# Altium PCB 1.PcbDoc
Units mm, origin at the board's own origin, x right, y up, seen from the top; angles counter-clockwise.
Board outline 80.01 x 70 mm, 2 copper layers (Top Layer, Bottom Layer); 48 components, 24 nets, 118 pads, 16 vias.
Unrouted connection lines stored in the file: 9.
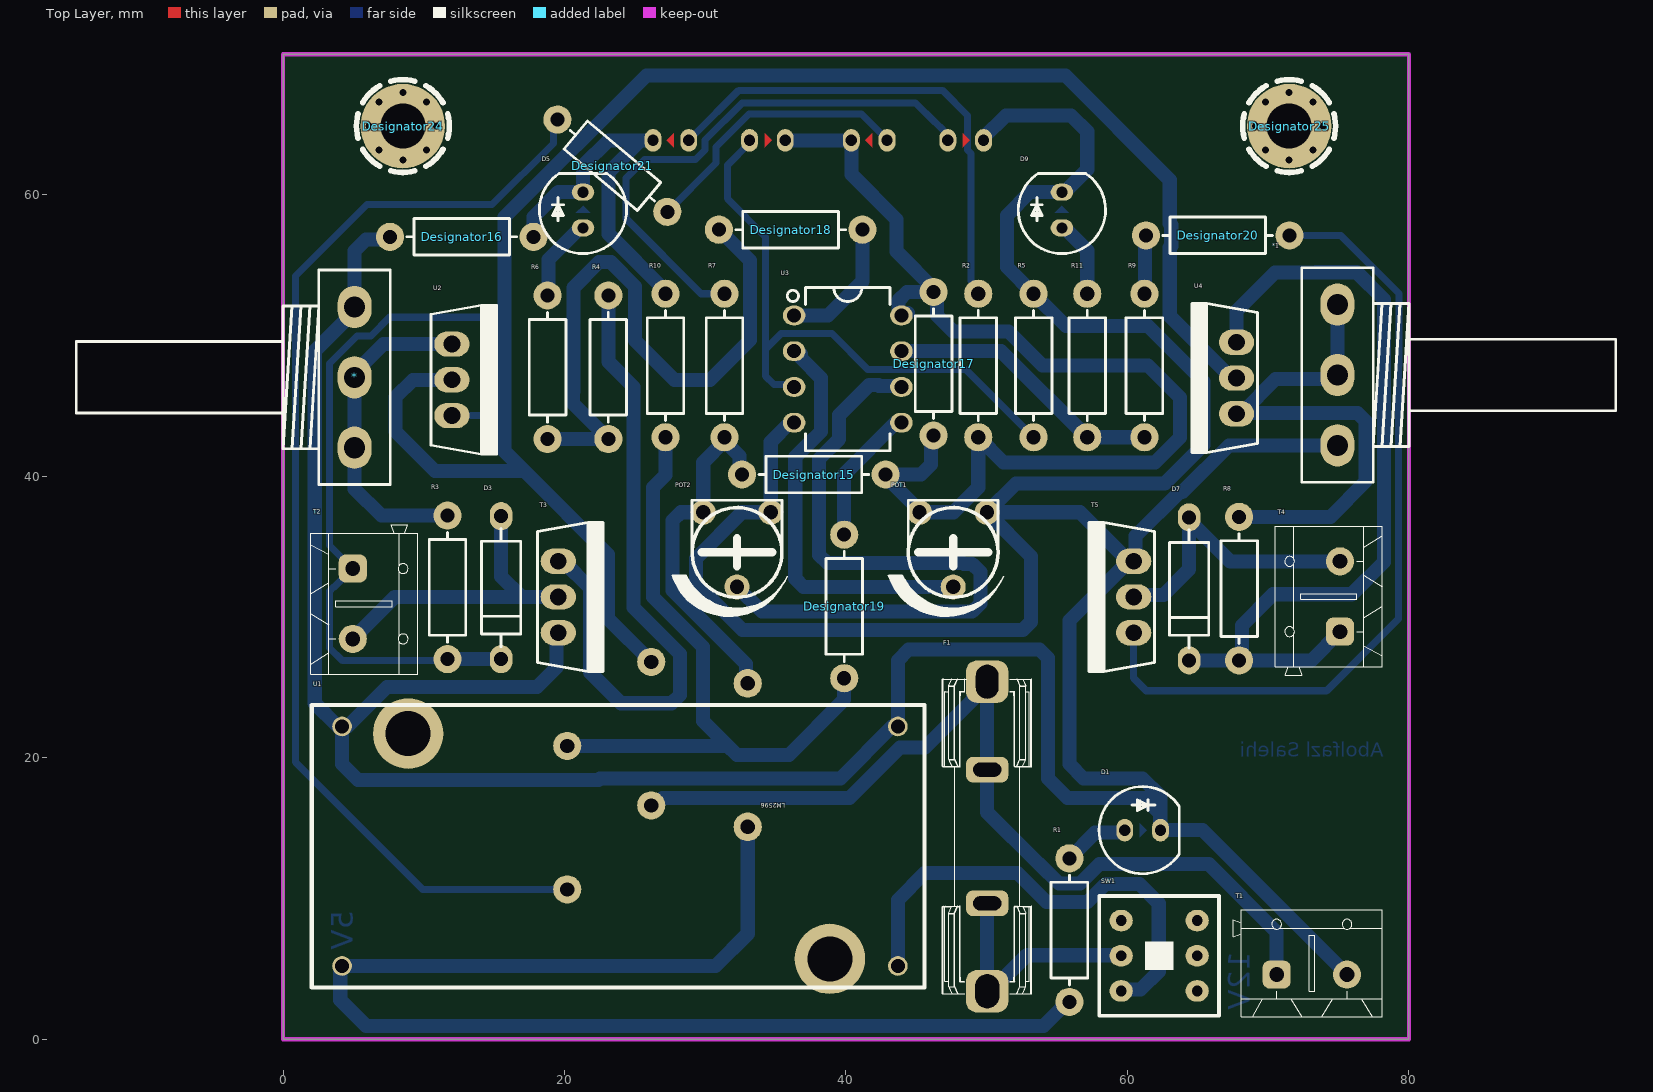
[diagram p0: Top Layer view]
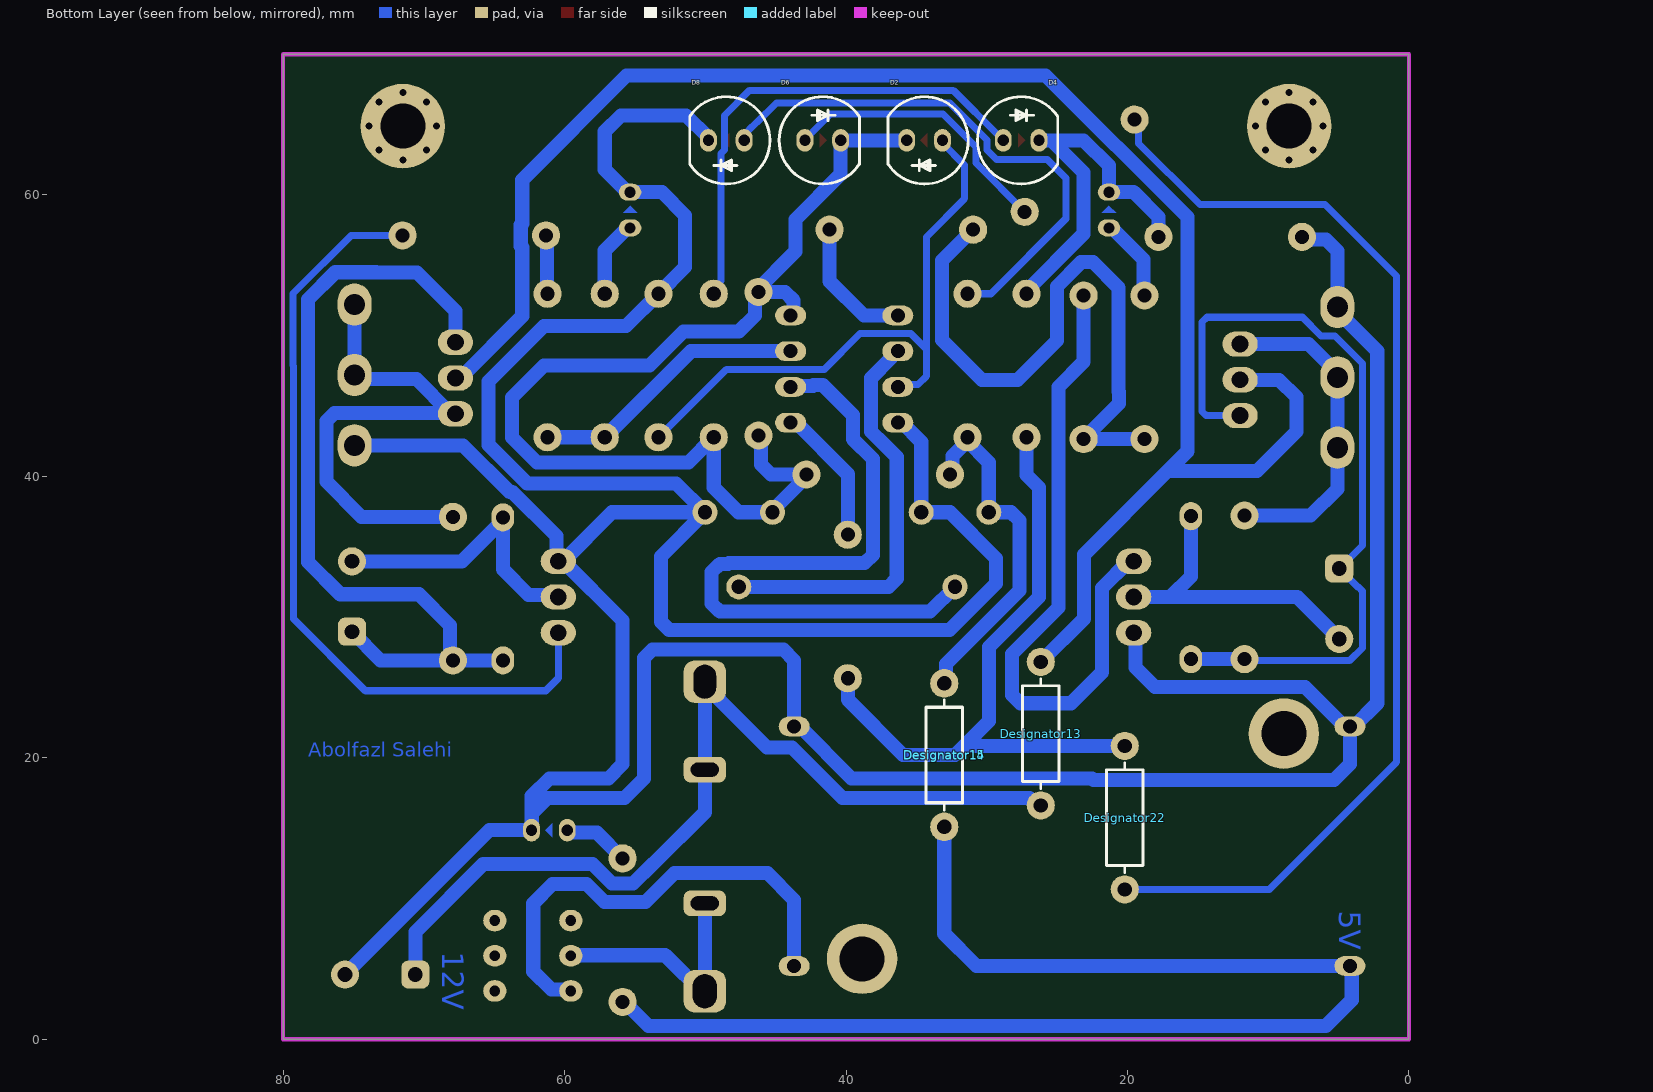
[diagram p1: Bottom Layer view, seen from below]
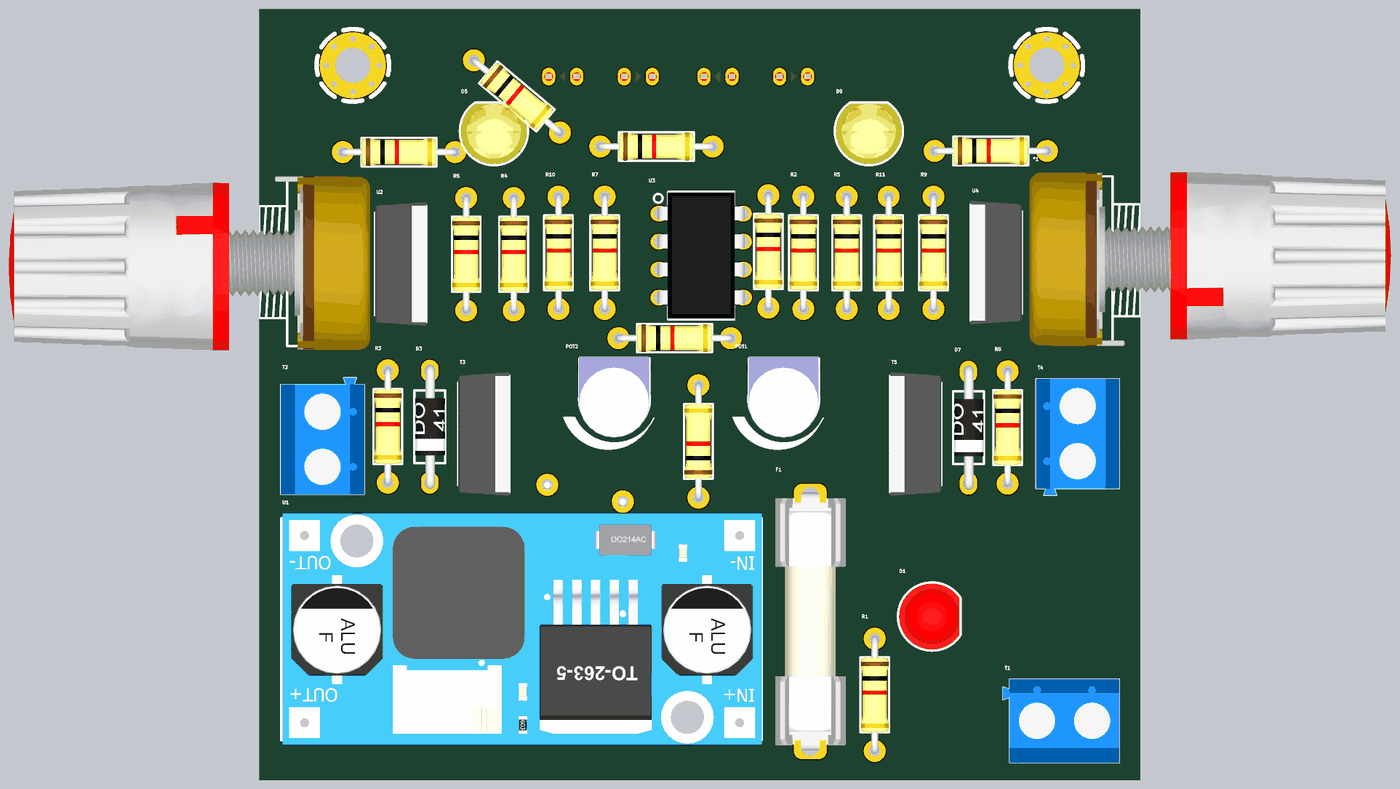
[diagram p2: 3D render of the assembled board from above, using the file's embedded part models]
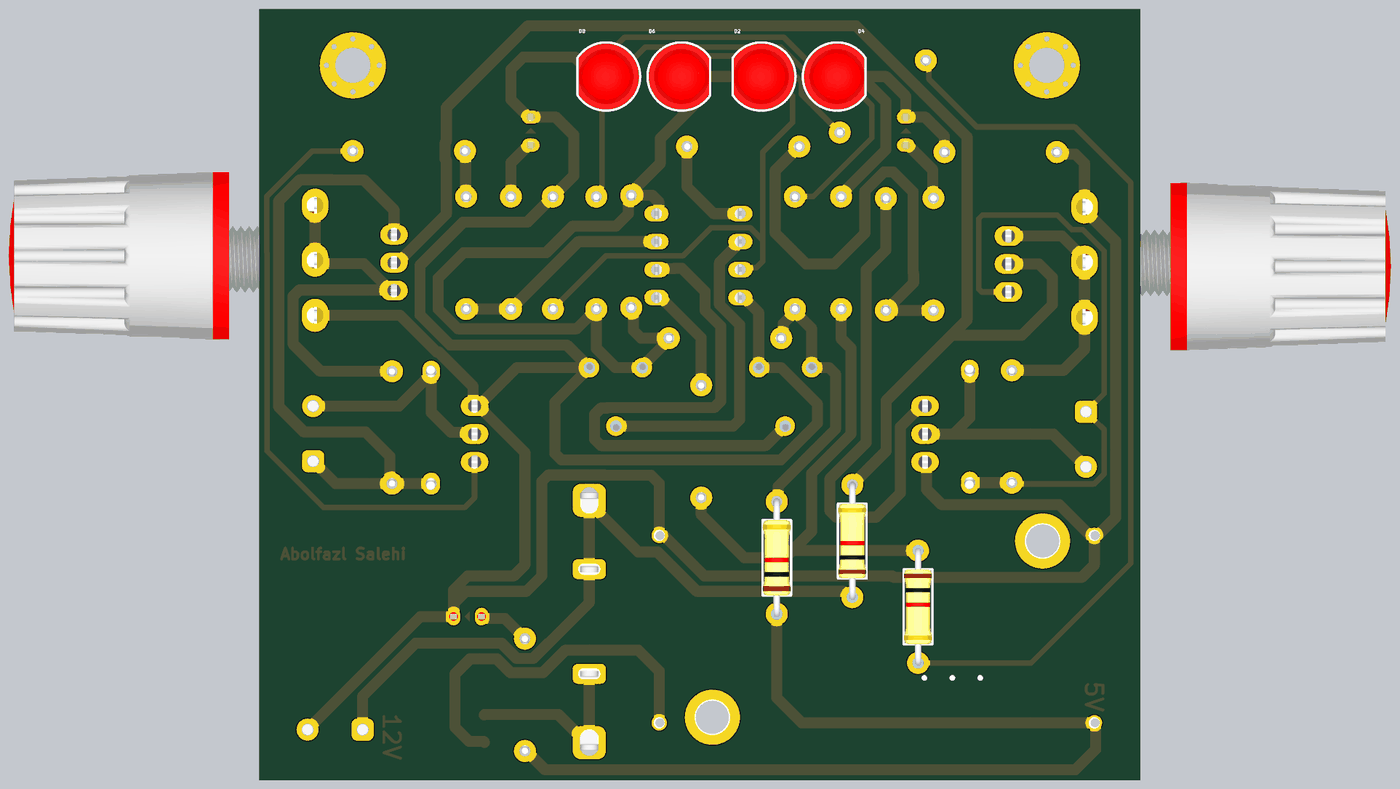
[diagram p3: 3D render of the assembled board from below, using the file's embedded part models]

## Layer stack, top to bottom
Top Solder: solder mask 0.0102, Solder Resist, Dk 3.5
Top Layer: signal copper 0.0356
Dielectric 1: dielectric 0.32, FR-4, Dk 4.8
Bottom Layer: signal copper 0.0356
Bottom Solder: solder mask 0.0102, Solder Resist, Dk 3.5

## Board outline
0,0 0,70 80,70 80.01,69.99 80.01,0

## Design rules (kind name [scope] priority, off if disabled: settings)
Clearance [All] p1: gap=0.3 ignorepadtopadclearanceinfootprint=FALSE
ComponentClearance [All] p1: gap=0 collisioncheckmode=3 verticalgap=2540 showdistances=FALSE
PolygonConnect [All] p1: connectstyle=Relief reliefconductorwidth=0.254 reliefentries=4 polygonreliefangle="90 Angle" airgapwidth=0.254
RoutingLayers [All] p1: top layer_v5=FALSE bottom layer_v5=TRUE
RoutingVias [All] p1: holewidth=0.711 width=1.27 viastyle="Through Hole" minholewidth=0.711 minwidth=1.27 maxholewidth=0.711 maxwidth=1.27
SolderMaskExpansion [All] p1: expansion=0.102 istentingtop=FALSE
Width [All] p1: maxlimit=1.5 minlimit=0.5 preferedwidth=1
28 further rules are at their usual default settings.

## Classes and differential pairs
component class 1: * *1 D1 D3 D4 D5 D6 D7 D8 D9 F1 POT1 POT2 R1 R2 R3 R4 R5 R6 R7 R8 R9 R10 R11 SW1 T1 T2 T3 T4 T5 U1 U2 U3 U4

## Components (designator, comment, footprint, x,y, rotation, side; value= is the part's Value field where it differs from the comment)
* "siglar pot" VOL_R 5.08,47.037 r90 top
*1 "siglar pot" VOL_R 74.93,47.208 r270 top
D1 "LED_THD_RED" LED5MM_RED 61.086,14.859 r0 top
D2 "LED_THD_RED" LED5MM_RED 34.417,63.881 r0 bottom
D3 "1N4007" D_AX04_DO41 15.494,32.09 r270 top
D4 "LED_THD_BLU" LED5MM_BLU 27.559,63.881 r180 bottom
D5 "LED_THD_YLW" LED5MM_YLO 21.314,58.928 r90 top
D6 "LED_THD_RED" LED5MM_RED 41.656,63.881 r180 bottom
D7 "1N4007" D_AX04_DO41 64.389,32.004 r270 top
D8 "LED_THD_BLU" LED5MM_BLU 48.514,63.881 r0 bottom
D9 "LED_THD_YLW" LED5MM_YLO 55.35,58.928 r90 top
Designator13 "Comment" R025W_AX04 26.162,21.717 r90 bottom
Designator14 "Comment" R025W_AX04 33.02,20.173 r90 bottom
Designator15 "Comment" R025W_AX04 37.719,40.132 r0 top
Designator15 "Comment" R025W_AX04 33.02,20.215 r90 bottom
Designator16 "Comment" R025W_AX04 12.7,57.023 r0 top
Designator17 "Comment" R025W_AX04 46.228,48.006 r270 top
Designator18 "Comment" R025W_AX04 36.068,57.531 r0 top
Designator19 "Comment" R025W_AX04 39.878,30.754 r90 top
Designator20 "Comment" R025W_AX04 66.421,57.128 r0 top
Designator21 "Comment" R025W_AX04 23.398,62.079 r320 top
Designator22 "Comment" R025W_AX04 20.193,15.748 r270 bottom
Designator24 "Comment" SCMH_M3 8.509,64.897 r0 top
Designator25 "Comment" SCMH_M3 71.501,64.897 r0 top
F1 "F=1.0 A" "Fuse 5x20 With holder pin" 50.038,14.408 r0 top
POT1 "10K" "POT 4" 47.625,34.798 r180 top
POT2 "10K" "POT 4" 32.258,34.798 r180 top
R1 "220" R025W_AX04 55.88,7.754 r270 top
R2 "220" R025W_AX04 49.403,47.879 r270 top
R3 "220" R025W_AX04 11.684,32.11 r270 top
R4 "1K" R025W_AX04 23.114,47.752 r270 top
R5 "10K" R025W_AX04 53.34,47.879 r270 top
R6 "220" R025W_AX04 18.796,47.752 r270 top
R7 "220" R025W_AX04 31.369,47.879 r270 top
R8 "220" R025W_AX04 67.945,32.024 r270 top
R9 "1K" R025W_AX04 61.214,47.879 r270 top
R10 "10K" R025W_AX04 27.178,47.879 r270 top
R11 "220" R025W_AX04 57.15,47.879 r270 top
SW1 "Switch DPDT" "Switch DPDT" -22.362,-48.283 r0 top
T1 "KF301_Terminal" "KF301 2PIN" 73.112,4.592 r0 top
T2 "KF301_Terminal" "KF301 2PIN" 4.953,30.948 r270 top
T3 "NPN" TO-220 19.558,31.429 r270 top
T4 "KF301_Terminal" "KF301 2PIN" 75.112,31.462 r90 top
T5 "NPN" TO-220 60.452,31.429 r90 top
U1 "LM2596" LM2596_MODULE 43.688,5.207 r180 top
U2 "LM317" TO-220 11.993,46.863 r270 top
U3 "LM358" DIP_8 40.132,47.625 r0 top
U4 "LM317" TO-220 67.763,46.99 r90 top

## Footprints (in the part's own frame and the unit in brackets; to place one, negate y for a bottom-side part, rotate by r counter-clockwise, add the part's x,y. Pads: shape width x height; smd on the part's side, far side on the other; paste and mask are expansions set on the pad)
D_AX04_DO41 [mm] "DIODE 0.4 INCH SPACING DO-41"
  oval 2x1.6 hole 1: 1(-5.08,0) 2(5.08,0)
  silkscreen extent -4.2,-1.4 4.2,1.4, body extent -5.68,-1.32 5.68,1.4, height 2.85
DIP_8 [mm] "DIP, pitch 2.54mm, 300mil Width"
  oval 1.6x1.4 / inner round 1.4 / far side oval 2.2x1.4 hole 1: 1(-3.81,3.81) 2(-3.81,1.27) 3(-3.81,-1.27) 4(-3.81,-3.81) 5(3.81,-3.81) 6(3.81,-1.27) 7(3.81,1.27) 8(3.81,3.81)
  silkscreen extent -4.3,-5.8 3,5.8, body extent -3.94,-5.7 3.94,5.73, height 4.19
"Fuse 5x20 With holder pin" [mm] "Dsigner : Abbas Basereh"
  rrect50% 3x1.8 hole 1 slot 2 at 0 deg: 1(0,4.75) 2(0,-4.75)
  rrect50% 3x3 hole 1.6 slot 2.4 at 90 deg: 1(0,11)
  rrect50% 3x3 hole 1.7 slot 2.4 at 90 deg: 2(0,-11)
  silkscreen extent -3.18,-11.19 3.17,11.19, body extent -3.17,-11.69 3.17,11.69, height 8.63
"KF301 2PIN" [mm] "Designer Abbas Basereh"
  rrect50% 2x2 hole 1.05: 1(-2.5,0)
  round 2 hole 1.05: 2(2.5,0)
  silkscreen extent -5.6,-3 5,4.6, body extent -5.6,-3 5,4.6, height 10
LED5MM_BLU [mm] "LED THD 5MM BLUE"
  oval 1.2x1.6 hole 0.8: 1(-1.27,0) 2(1.27,0)
  Bottom Layer region: -0.2,0.5 -0.2,-0.5 0.3,0
  silkscreen extent -3.1,-3.1 2.6,3.1, body extent -3,-3 2.5,3, height 9.14
LED5MM_RED [mm] "LED THD 5MM RED"
  oval 1.2x1.6 hole 0.8: 1(-1.27,0) 2(1.27,0)
  Bottom Layer region: -0.2,0.5 -0.2,-0.5 0.3,0
  silkscreen extent -3.1,-3.1 2.6,3.1, body extent -3,-3 2.5,3, height 9.14
LED5MM_YLO [mm] "LED THD 5MM YELLOW"
  oval 1.2x1.6 hole 0.8: 1(-1.27,0) 2(1.27,0)
  Bottom Layer region: -0.2,0.5 -0.2,-0.5 0.3,0
  silkscreen extent -3.1,-3.1 2.6,3.1, body extent -3,-3 2.5,3, height 9.14
LM2596_MODULE [mm]
  round 1.4 / inner round 1.4 / far side oval 2.2x1.4 hole 1: 1(0,0) 2(0,-17.018) 3(39.497,-17.018) 4(39.497,0)
  round 5 / inner round 3.5 / far side round 5 hole 3.2 mask+0.1: ""(4.826,-0.508) ""(34.798,-16.51)
  silkscreen extent -1.91,-18.54 41.66,1.52, body extent -1.94,-19.01 41.56,1.99, height 13.01
"POT 4" [mil] "Trimmer"
  round 70 hole 40: 1(-94.49,-104.33) 2(94.49,-104.33) 3(0,104.33)
  silkscreen extent -141,-138 181,187, body extent -125,-144 127,145, height 187
R025W_AX04 [mm] "RESISTOR 1/4 WATT, AXIAL0.4"
  round 2 hole 1: 1(-5.1,0) 2(5.1,0)
  silkscreen extent -3.9,-1.3 3.9,1.3, body extent -5.38,-1.29 5.38,1.29, height 2.6
SCMH_M3 [mm] "SCREW mouting, M3, 3.0mm diameter and 6.0mm PanHead"
  round 6 / inner round 3.5 / far side round 6 hole 3.2 mask+0.1: 1(0,0)
  Top Layer pour cut-out: 0,3.5 -1.339,3.234 -2.475,2.475 -3.234,1.339 -3.5,0 -3.5,0 -3.234,-1.339 -2.475,-2.475 -1.339,-3.234 0,-3.5 0,-3.5 1.75,-3.031 3.031,-1.75 3.5,0 3.5,0 3.234,1.339 2.475,2.475 1.339,3.234 0,3.5
  Bottom Layer pour cut-out: 0,3.5 -1.339,3.234 -2.475,2.475 -3.234,1.339 -3.5,0 -3.5,0 -3.234,-1.339 -2.475,-2.475 -1.339,-3.234 0,-3.5 0,-3.5 1.75,-3.031 3.031,-1.75 3.5,0 3.5,0 3.234,1.339 2.475,2.475 1.339,3.234 0,3.5
  silkscreen extent -3.3,-3.3 3.3,3.3
"Switch DPDT" [mil]
  oval 65x60 hole 30: 1(3225.39,2232.76) 2(3225.39,2134.33) 3(3225.39,2035.91) 4(3437.99,2035.91) 5(3437.99,2134.33) 6(3437.99,2232.76)
  silkscreen extent 3164,1967 3499,2302, body extent 3164,1967 3499,2302, height 559
TO-220 [mm]
  oval 1.8x2.5 hole 1.2: 1(-2.54,0) 2(0,0) 3(2.54,0)
  silkscreen extent -5.29,-1.48 5.29,3.17, body extent -5.61,-1.49 5.61,3.2, height 19.3
VOL_R [mm] "VOULME RIGHT ANGLE"
  oval 3x2.4 hole 1.5: 1(-5,0) 2(0,0) 3(5,0)
  silkscreen extent -7.62,-2.54 7.62,19.78, body extent -10.76,-5 10.93,27.8, height 24.54

## Part data
D1 D2 D6: "LED, THD, RED"
D3 D7: library part DIODE_THD_1N4007, "DIODE, GENERAL PURPOSE, 1000V/1A", ASSEMBLY=ASSEMBLY, DESC=DESCRIPTION, MANF=Diodes, MANF_P#=1N4007, PARAM="1000V, 1.15V", PARAM2=1.5A, PRICE=PRICE
D4 D8: "LED, THD, BLU"
D5 D9: "LED, THD, YELLOW"
F1: library part "Fuse 5x20 with holdeer pins", "Fuses 5x20", Data=28-12-2016, Desc.="fuse with holder pins 5x20", Designer="Abbas Basereh"
POT1 POT2: library part POT, "Variable Resistor"
R1 R2 R3 R4 R5 R6 R7 R8 R9 R10 R11: library part RES_THD, "RESISTOR, THD", ASSEMBLY=ASSEMBLY, DESC=DESCRIPTION, DIST#=MOUSER, MANF="KOA SPEER", MANF_P#=RK73H1ETTP4701F, PARAM=0.063W, PARAM2=1%, PRICE="100= 0.5$"
T1 T2 T4: library part KF301-2Pin_Terminal, "Terminal 2 Pin 250VAC 16A", Designer="Abbas Basereh", Link=https://www.aliexpress.com/item/, Part. No="KF301 2P"
T3 T5: library part TIP41
U1: library part LM2596_ADJ, "DC-DC converter"
U3: library part LM358_DIP8, "AMP, Dual, Low-Power", MANF="Texas Instruments, Fairchild", MANF_P#=LM358AN, PARAM2="3 V ~ 32 V, ±1.5 V ~ 16 V", PRICE=-

## Via types
v1: diameter 0.8, hole 0.5, Top Layer to Bottom Layer, 16 vias

## Nets (pads, with @x,y where several pads share a name; then routed paths per layer and width w, separated by ;. In a path a pad name is that pad's centre, name@x,y a point inside that pad or via, vN(x,y) a via of type N, cw(c..) or ccw(c..) an arc to the next point about the centre after c; other vN are vias at no path point)
+5: D2.2 D6.2 Designator14.1 Designator14.2 Designator15.1 Designator15.2 Designator17.1 Designator17.2 POT1.2 POT2.2 R1.2 R2.2 R7.2 U1.4 U3.8 | length 198.7
  Bottom Layer w1: R7.2 R7.2@31.369,42.508 ; Designator15.1@32.619,40.132 32.428,40.323 32.428,41.45 R7.2@31.369,42.508 ; Designator14.1 33.02,7.493 30.734,5.207 U1.4 4.064,5.08 4.064,2.794 5.908,0.95 54.048,0.95 55.752,2.654 R1.2 ; Designator14.2 32.887,25.406 32.887,26.676 27.686,31.877 27.686,36.862 28.272,37.448 POT2.2 29.858,40.997 R7.2@31.369,42.508 ; D2.2 D6.2 40.386,61.468 43.592,58.262 43.592,55.996 Designator17.1@46.482,53.106 ; U3.8@44.419,51.62 44.234,51.435 U3.8 43.906,51.435 43.721,51.62 43.721,52.484 44.343,53.106 Designator17.1@46.482,53.106 ; Designator17.2 46.037,42.715 46.037,40.83 45.339,40.132 42.819,40.132 42.819,39.993 45.225,37.587 POT1.2 47.636,37.448 49.403,39.215 R2.2 51.203,40.979 61.96,40.979 63.754,42.773 63.754,45.593 61.468,47.879 53.975,47.879 51.562,50.292 47.625,50.292 46.482,51.435 Designator17.1@46.482,53.106
+12: Designator13.1 Designator13.2 F1.1 T1.1 U2.2 U4.2 | length 189
  Bottom Layer w1: U2.2 9.222,46.863 8.001,45.642 8.001,43.18 10.795,40.386 17.145,40.386 ; Designator13.1 26.433,16.617 26.961,17.145 40.259,17.145 43.839,20.725 45.617,20.725 49.038,24.146 49.038,24.272 50.038,25.272 F1.1@50.038,25.408 ; Designator13.2@26.182,26.797 23.098,29.881 23.098,34.433 17.145,40.386 ; F1.1@50.038,25.154 50.038,19.158 50.038,16.129 53.721,12.446 53.742,12.446 55.134,11.054 56.626,11.054 58.018,12.446 65.786,12.446 70.612,7.62 T1.1 ; U4.2 67.413,46.99 63.014,51.389 63.014,56.275 63.121,56.382 63.121,57.874 63.014,57.981 63.014,61.065 55.592,68.487 25.815,68.487 15.748,58.42 15.748,41.783 17.145,40.386
GND: *1.3 *.3 D1.2 D4.2 D5.2 D8.2 D9.2 Designator16.1 Designator16.2 POT1.1 POT2.1 R5.1 R10.1 T1.2 T3.3 T5.3 U1.2 U1.3 U3.4 | length 349.8
  Bottom Layer w1: Designator16.1 7.409,56.832 5.905,56.832 5.08,56.007 *.3 5.08,51.737 2.25,48.907 2.25,23.874 3.899,22.225 U1.3 ; Designator16.2 17.8,58.44 19.558,60.198 D5.2 21.314,62.081 23.114,63.881 25.4,63.881 ; T3.3 19.431,28.762 19.431,26.416 18.032,25.017 7.383,25.017 4.591,22.225 U1.3 ; D4.2 25.4,63.881 ; R10.1 27.178,53.176 23.114,57.24 23.114,61.595 25.4,63.881 ; U3.4 36.03,43.815 34.658,42.443 POT2.1 32.622,37.448 29.337,34.163 29.337,32.385 32.639,29.083 52.568,29.083 53.154,29.669 53.154,34.319 POT1.1 ; D8.2 49.784,64.081 51.362,65.659 56.007,65.659 57.15,64.516 57.15,61.798 55.55,60.198 D9.2 53.086,60.198 51.435,58.547 51.435,54.884 R5.1 55.646,50.673 61.468,50.673 65.405,46.736 65.405,42.244 62.66,39.499 52.076,39.499 POT1.1 ; *1.3 67.227,42.208 63.903,38.884 63.726,38.884 60.592,35.75 60.592,34.109 T5.3 T5.3@60.102,33.969 ; T1.2 65.345,14.859 D1.2 ; U1.3 4.191,19.558 5.332,18.417 22.406,18.417 22.531,18.542 39.605,18.542 43.288,22.225 U1.2 43.688,26.924 44.45,27.686 48.624,27.686 48.646,27.708 53.749,27.708 54.356,27.1 54.356,18.542 55.753,17.145 61.214,17.145 62.318,16.041 62.318,14.897 D1.2 ; POT1.1 56.623,37.448 T5.3@60.102,33.969 ; T5.3@60.102,33.969 55.88,29.747 55.88,19.558 56.896,18.542 61.087,18.542 62.356,17.273 D1.2
Net*1_1: *1.1 *1.2 R8.1 U4.1 | length 36.8
  Bottom Layer w1: U4.1 67.821,44.508 U4.1@68.141,44.508 ; R8.1 74.432,37.124 76.932,39.624 76.932,43.922 76.346,44.508 U4.1@68.141,44.508 ; *1.1 74.93,46.908 70.541,46.908 U4.1@68.141,44.508
Net*_1: *.1 *.2 R3.1 U2.1 | length 23.4
  Bottom Layer w1: R3.1 6.986,37.21 5.08,39.116 *.2 5.08,47.337 7.146,49.403 U2.1
NetD1_1: D1.1 R1.1 | length 4.8
  Bottom Layer w1: R1.1 55.881,12.854 57.716,14.688 59.724,14.688 59.816,14.781 D1.1
NetD2_1: D2.1 R5.2 U3.3 | length 43.4
  Bottom Layer w0.5: D2.1 33.147,63.681 31.579,62.113 31.579,59.734 34.29,57.023 34.29,49.031 ; U3.3 36.15,46.527 34.88,46.527 34.29,47.117 34.29,49.031 ; R5.2 48.514,47.605 41.549,47.605 39.009,50.145 35.404,50.145 34.29,49.031
NetD3_1: D3.1 T2.2 T3.2 | length 22.2
  Bottom Layer w1: T2.2 7.934,31.429 16.958,31.429 ; D3.1 15.494,32.893 16.958,31.429 ; T3.2 16.958,31.429
NetD3_2: D3.2 R3.2 T2.1 U2.3 | length 56.3
  Bottom Layer w0.5: R3.2 11.572,26.898 4.217,26.898 3.302,27.813 3.302,31.838 3.595,32.131 3.636,32.131 T2.1 3.302,35.099 3.302,48.034 5.255,49.987 6.245,49.987 7.566,51.308 14.351,51.308 14.698,50.961 14.698,44.616 14.405,44.323 U2.3
  Bottom Layer w1: R3.2 D3.2
NetD4_1: D4.1 R2.1 | length 35
  Bottom Layer w0.5: D4.1 28.829,63.892 29.152,64.215 29.163,64.215 32.385,67.437 46.863,67.437 48.641,65.659 48.641,64.564 48.634,64.557 48.634,63.205 48.895,62.944 48.895,53.893 49.403,53.385 R2.1
NetD5_1: D5.1 R6.1 | length 6
  Bottom Layer w1: R6.1 18.862,52.918 18.862,55.406 21.114,57.658 D5.1
NetD6_1: D6.1 Designator19.1 Designator19.2 Designator21.1 Designator21.2 Designator22.1 Designator22.2 R10.2 U3.5 | length 159.1
  Bottom Layer w0.5: Designator21.1 19.204,65.07 19.204,63.654 14.859,59.309 5.969,59.309 0.889,54.229 0.889,19.685 9.926,10.648 Designator22.2 ; Designator21.2 30.779,62.275 30.779,63.418 33.109,65.748 41.109,65.748 42.926,63.931 D6.1
  Bottom Layer w1: Designator22.1 31.603,20.848 ; R10.2 27.178,40.102 26.289,39.213 26.289,31.436 29.845,27.88 29.845,22.606 31.603,20.848 ; Designator19.1 39.878,24.13 35.941,20.193 32.258,20.193 31.603,20.848 ; Designator19.2 39.878,40.151 43.542,43.815 U3.5
NetD7_1: D7.1 T4.2 T5.2 | length 20.4
  Bottom Layer w1: T5.2 60.605,31.582 62.57,31.582 64.389,33.401 D7.1@64.389,36.884 ; D7.1 D7.1@64.389,36.884 ; T4.2 67.311,33.962 D7.1@64.389,36.884
NetD7_2: D7.2 R8.2 T4.1 U4.3 | length 59.4
  Bottom Layer w1: D7.2 R8.2 ; U4.3 67.763,51.761 70.485,54.483 73.381,54.483 73.406,54.508 76.302,54.508 78.232,52.578 78.232,33.909 75.946,31.623 70.358,31.623 68.136,29.401 68.136,27.115 R8.2 ; T4.1 73.074,26.924 R8.2
NetD8_1: D8.1 R7.1 | length 38.9
  Bottom Layer w0.5: R7.1 29.711,52.979 24.384,58.306 24.384,61.214 25.701,62.531 29.305,62.531 29.979,63.205 29.979,63.9 32.627,66.548 44.954,66.548 46.351,65.151 46.374,65.151 46.894,64.631 46.894,64.62 47.244,64.27 D8.1
NetD9_1: D9.1 R11.1 | length 5.5
  Bottom Layer w1: D9.1 55.55,57.658 57.15,56.058 R11.1
NetF1_2: F1.2 SW1.2 | length 17
  Bottom Layer w1: F1.2@50.038,9.404 50.038,3.154 52.853,5.969 59.523,5.969 SW1.2
NetPOT1_3: POT1.3 U3.2 | length 29.3
  Bottom Layer w1: U3.2 36.507,48.71 36.799,48.71 36.799,48.4 38.222,46.976 38.222,43.194 37.31,42.282 36.399,41.37 36.399,32.734 36.984,32.148 POT1.3
NetPOT2_3: POT2.3 U3.6 | length 48.3
  Bottom Layer w1: POT2.3 34.023,30.383 48.974,30.383 49.56,30.969 49.56,33.196 48.974,33.782 48.38,33.782 48.325,33.837 38.686,33.837 38.1,34.423 38.1,41.233 39.522,42.655 39.522,44.348 41.656,46.482 42.307,46.482 42.357,46.432 43.865,46.432 U3.6
NetR4_1: R4.1 T3.1 | length 47.1
  Bottom Layer w1: T3.1 19.908,33.969 21.798,32.079 21.798,26.081 24.003,23.876 27.608,23.876 28.194,24.462 28.194,27.372 24.892,30.674 24.892,41.884 24.914,41.906 24.914,46.344 23.114,48.144 R4.1
NetR4_2: Designator18.1 Designator18.2 R4.2 R6.2 U3.1 | length 54.6
  Bottom Layer w1: R6.2 R4.2 20.597,45.169 20.597,45.997 20.637,46.038 20.637,53.404 22.46,55.226 23.289,55.226 25.019,53.496 25.019,49.657 27.813,46.863 30.353,46.863 33.169,49.679 33.169,55.33 Designator18.1 ; U3.1 38.735,51.435 41.168,53.868 Designator18.2
NetR9_1: Designator20.1 Designator20.2 R9.1 T5.1 | length 61.4
  Bottom Layer w0.5: T5.1 60.452,25.654 61.341,24.765 74.168,24.765 79.282,29.879 79.282,47.851 79.31,47.879 79.31,52.985 75.167,57.128 Designator20.2
  Bottom Layer w1: R9.1 61.268,53.032 61.268,57.075 Designator20.1
NetR9_2: R9.2 R11.2 U3.7 | length 19.8
  Bottom Layer w1: U3.7 51.034,48.895 R11.2 R9.2
NetSW1_3: SW1.3 U1.1 | length 34.1
  Bottom Layer w1: U1.1 43.688,9.906 45.593,11.811 52.197,11.811 54.254,9.754 57.164,9.754 58.44,11.029 60.853,11.029 62.23,9.652 62.23,4.826 60.933,3.529 59.663,3.529 SW1.3
pads on no net: Designator24.1 Designator25.1 SW1.1 SW1.4 SW1.5 SW1.6 U1.
copper on no net:
  other v1: 8.509,62.497 71.501,62.497 6.812,63.2 10.206,63.2 69.804,63.2 73.198,63.2 6.109,64.897 10.909,64.897 69.101,64.897 73.901,64.897 6.812,66.594 10.206,66.594 69.804,66.594 73.198,66.594 8.509,67.297 71.501,67.297

## Keep-outs
Keep-Out Layer:
  the board outline again, w0.3

## Other copper
Bottom Layer:
  text "Abolfazl Salehi" at 78.232,20.066 h1
  text "5V" at 4.953,9.144 h1.52 r90
  text "12V" at 68.707,6.223 h1.52 r90